# Altium PCB PCB_Rev1.PcbDoc
Units mil, origin at the board's own origin, x right, y up, seen from the top; angles counter-clockwise.
Board outline 835 x 1005 mil, 2 copper layers (Top Layer, Bottom Layer); 29 components, 21 nets, 120 pads, 30 vias.
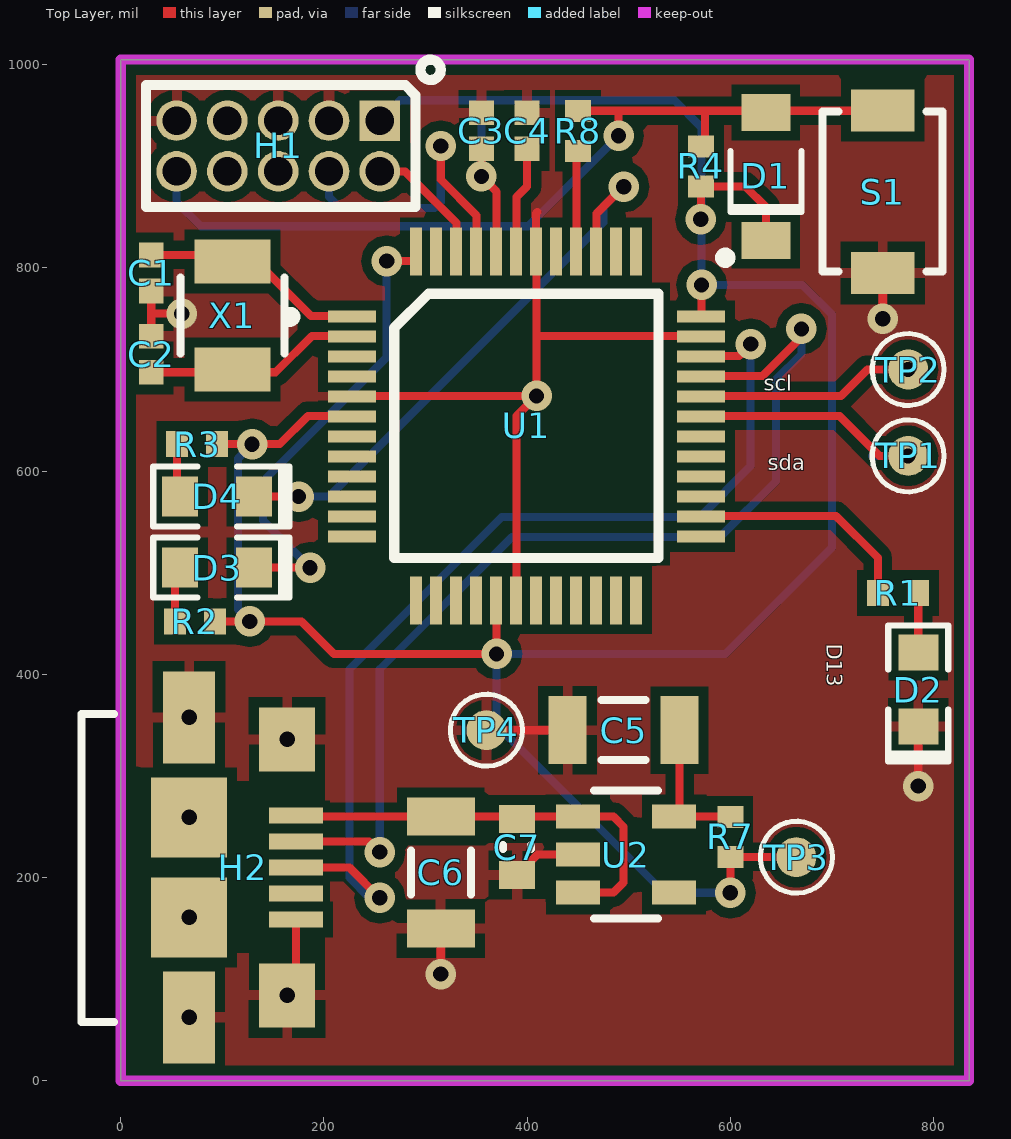
[diagram p0: Top Layer view]
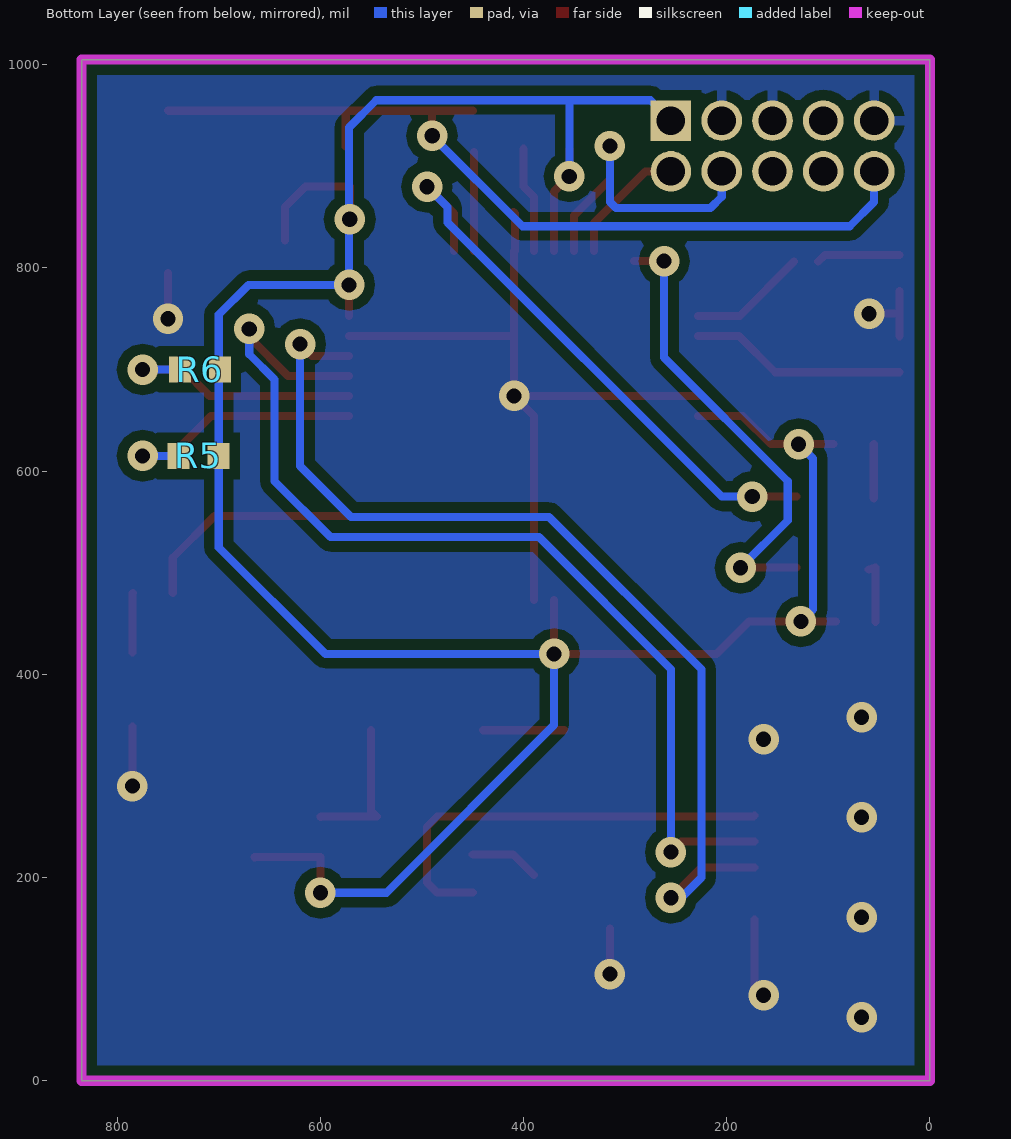
[diagram p1: Bottom Layer view, seen from below]
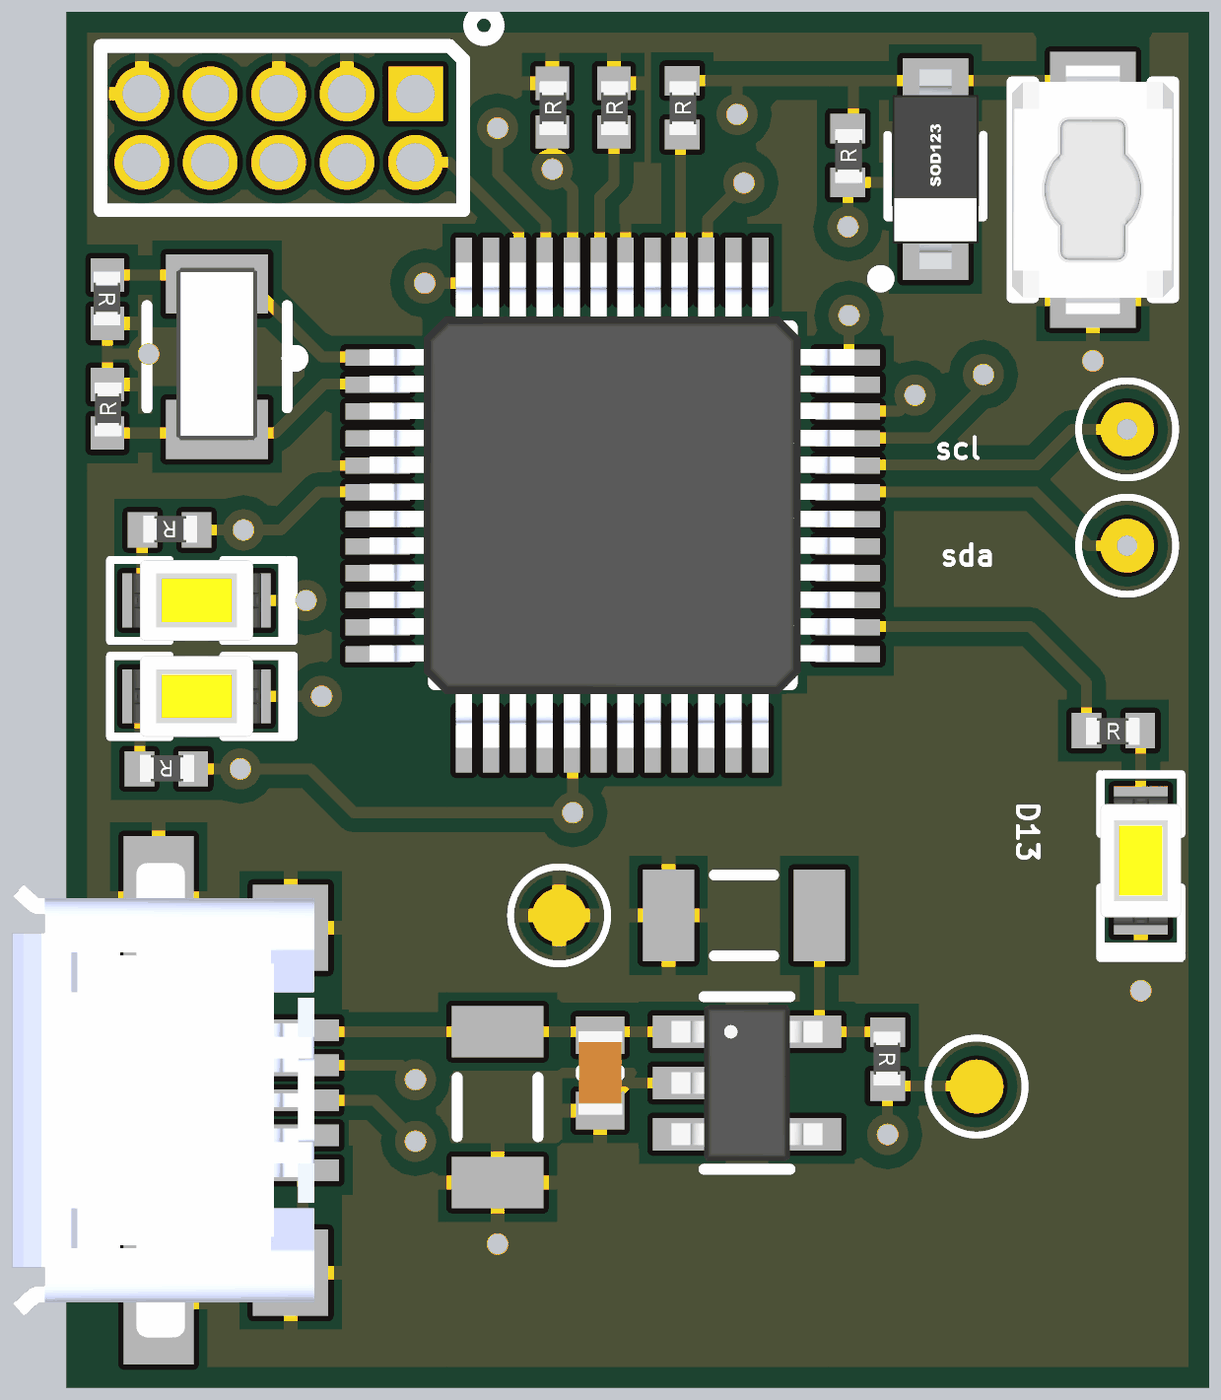
[diagram p2: 3D render of the assembled board from above, using the file's embedded part models]

## Layer stack, top to bottom
Top Solder: solder mask 0.4, Solder Resist, Dk 3.5
Top Layer: signal copper 1.4
Dielectric 1: dielectric 12.6, FR-4, Dk 4.8
Bottom Layer: signal copper 1.4
Bottom Solder: solder mask 0.4, Solder Resist, Dk 3.5

## Board outline
0,0 835,0 835,1005 0,1005

## Design rules (kind name [scope] priority, off if disabled: settings)
Clearance Clearance_U1 [HasFootprint ('LQFP48')] p1: gap=7
Clearance Clearance_USB [HasFootprint ('1981584-1')] p2: gap=7
Clearance [All] p3: gap=10
MinimumSolderMaskSliver [All] p1: minsoldermaskwidth=1
PolygonConnect PolygonConnect_GND [(IsVia) vs InNet('GND')] p1: connectstyle=Direct reliefconductorwidth=10 reliefentries=4 polygonreliefangle="90 Angle" airgapwidth=10
PolygonConnect [All] p2: connectstyle=Relief reliefconductorwidth=10 reliefentries=4 polygonreliefangle="90 Angle" airgapwidth=10
RoutingVias [All] p1: holewidth=28 width=50 viastyle="Through Hole" minholewidth=15 minwidth=30 maxholewidth=15 maxwidth=30
SilkToSilkClearance [All] p1: silktosilkclearance=4
SilkToSolderMaskClearance [IsPad] p1: minsilkscreentomaskgap=3 clearancetoexposedcopper=TRUE
SolderMaskExpansion [All] p1: expansion=4
Width [All] p1: maxlimit=10 minlimit=8 preferedwidth=8
27 further rules are at their usual default settings.

## Components (designator, comment, footprint, x,y, rotation, side; value= is the part's Value field where it differs from the comment)
C1 "22pF" CAPC1005X56N 30,795 r270 top
C2 "22pF" CAPC1005X56N 30,715 r90 top
C3 "0.1uF" CAPC1005X56N 355,935 r90 top
C4 "1uF" CAPC1005X56N 400,935 r90 top
C5 "CAP_1206" CAPC3216X160L 495,345 r180 top
C6 "CAP_1206" CAPC3216X160L 315,205 r270 top
C7 "" CAPC1608X09L 390,230 r270 top
D1 "1N4148" SOD123 635,890 r90 top
D2 "LED_0603" LED1608X55N-YELLOW 785,385 r90 top
D3 "LED_0603" LED1608X55N-YELLOW 95,505 r180 top
D4 "LED_0603" LED1608X55N-YELLOW 95,575 r180 top
H1 "ISP" HDR5X2-50MIL 155,920 r180 top
H2 "Micro USB" 1981584-1 120,210 r270 top
R1 "470R" RESC1005X40N 765,480 r0 top
R2 "470R" RESC1005X40N 73,452 r180 top
R3 "470R" RESC1005X40N 75.31,626.54 r180 top
R4 "10K" RESC1005X40N 571,900 r90 top
R5 "10K" RESC1005X40N 720,615 r0 bottom
R6 "10K" RESC1005X40N 718.73,700.23 r0 bottom
R7 "0R" RESC1005X40N 600,240 r270 top
R8 "330R" RESC1005X40N 450,935 r90 top
S1 "PPushButton" TL1015AF160QG 750,875 r90 top
TP1 "Test Point, 1mm Top Layer" TP100TL 775,615 r90 top
TP2 "Test Point, 1mm Top Layer" TP100TL 775,700 r90 top
TP3 "Test Point, 1mm Top Layer" TP100TL 665,220 r90 top
TP4 "Test Point, 1mm Top Layer" TP100TL 360,345 r90 top
U1 "ATSAMD21G18A-MU" LQFP48 399.24,644.6 r0 top
U2 "LP2985-33DBVR" SOT95P280X144-5N 497.24,222.6 r0 top
X1 "ECS-.327-12.5-34B" ECS-.327-12.5-34B 110,755 r270 top

## Footprints (in the part's own frame and the unit in brackets; to place one, negate y for a bottom-side part, rotate by r counter-clockwise, add the part's x,y. Pads: shape width x height; smd on the part's side, far side on the other; paste and mask are expansions set on the pad)
1981584-1 [mm] "CONN RCPT MICRO USB TYPE AB"
  rect 0.4x1.35 smd: 1(-1.3,1.338) 2(-0.65,1.338) 3(0,1.338) 4(0.65,1.338) 5(1.3,1.338)
  rect 2.3x1.3 smd: ""(-3.75,-1.337) ""(3.75,-1.337)
  rect 1.6x1.4 smd: ""(-3.2,1.113) ""(3.2,1.113)
  rect 2x1.9 smd: ""(-1.25,-1.337) ""(1.25,-1.337)
  silkscreen extent -3.84,-4.02 3.86,-3.21, body extent -4.4,-4.05 4.4,1.55, height 2.75
CAPC1005X56N [mm] "Chip Capacitor, 2-Leads, Body 1.0x0.5mm, IPC Medium Density (0402 ceramic)"
  rect 0.62x0.62 smd: 1(-0.45,0) 2(0.45,0)
  body extent -0.55,-0.3 0.55,0.3, height 0.6
CAPC1608X09L [mm] "Chip Capacitor, 2-Leads, Body 1.6x0.8mm, IPC High Density (0603 dense)"
  rect 0.7x0.9 smd: 1(-0.7,0) 2(0.7,0)
  silkscreen extent -0.05,-0.35 0.05,0.35, body extent -0.89,-0.48 0.88,0.48, height 1.03
CAPC3216X160L [mm] "Chip Capacitor, 2-Leads, Body 3.2x1.6mm, IPC Least Density(C1206)"
  rect 0.95x1.7 smd: 1(-1.4,0) 2(1.4,0)
  silkscreen extent -0.55,-0.75 0.55,0.75, body extent -1.7,-0.9 1.7,0.9, height 1.9
ECS-.327-12.5-34B [mm] "SMT Crystal, 2-Leads, Body 3.2x1.5mm, IPC Medium Density"
  rect 1.1x1.9 smd: 1(-1.3,0) 2(1.4,0)
  silkscreen extent -0.9,-1.3 1,1.3, body extent -1.6,-0.75 1.6,0.75, height 0.91
HDR5X2-50MIL [mil]
  rect 40x40 hole 28: 1(-100,-25)
  round 40 hole 28: 2(-100,25) 3(-50,-25) 4(-50,25) 5(0,-25) 6(0,25) 7(50,-25) 8(50,25) 9(100,-25) 10(100,25)
  silkscreen extent -160,-85 130,60
LED1608X55N-YELLOW [mm] "Chip LED YELLOW, 2-Leads, Body 1.6x0.8mm, IPC Medium Density (0603 med)"
  rect 0.9x1 smd: 1(-0.925,0) 2(0.925,0)
  silkscreen extent -1.8,-0.75 1.6,0.75, body extent -1.2,-0.75 1.2,0.75, height 1.4
LQFP48 [mm] "48-TQFP (7x7) Wire Leads, LQFP48"
  rect 1.2x0.3 smd: 1(-4.362,2.738) 2(-4.362,2.238) 3(-4.362,1.738) 4(-4.362,1.238) 5(-4.362,0.738) 6(-4.362,0.238) 7(-4.362,-0.262) 8(-4.362,-0.762) 9(-4.362,-1.262) 10(-4.362,-1.762) 11(-4.362,-2.262) 12(-4.362,-2.762) 25(4.363,-2.762) 26(4.363,-2.262) 27(4.363,-1.762) 28(4.363,-1.262) 29(4.363,-0.762) 30(4.363,-0.262) 31(4.363,0.238) 32(4.363,0.738) 33(4.363,1.238) 34(4.363,1.738) 35(4.363,2.238) 36(4.363,2.738)
  rect 0.3x1.2 smd: 13(-2.762,-4.362) 14(-2.262,-4.362) 15(-1.762,-4.362) 16(-1.262,-4.362) 17(-0.763,-4.362) 18(-0.262,-4.362) 19(0.238,-4.362) 20(0.737,-4.362) 21(1.237,-4.362) 22(1.737,-4.362) 23(2.237,-4.362) 24(2.737,-4.362) 37(2.738,4.363) 38(2.238,4.363) 39(1.737,4.363) 40(1.238,4.363) 41(0.738,4.363) 42(0.238,4.363) 43(-0.262,4.363) 44(-0.762,4.363) 45(-1.262,4.363) 46(-1.762,4.363) 47(-2.262,4.363) 48(-2.762,4.363)
  silkscreen extent -6.02,-3.3 3.3,3.3, body extent -4.51,-4.5 4.49,4.5, height 1.5
RESC1005X40N [mm] "Chip Resistor, 2-Leads, Body 1.0x0.5mm, IPC Medium Density (0402)"
  rect 0.55x0.65 smd: 1(-0.5,0) 2(0.5,0)
  body extent -0.52,-0.27 0.53,0.28, height 0.4
SOD123 [mil] "Molded Diode, 2-Leads, Body 2.85x1.8mm, IPC Medium Density (SOD123)"
  rect 36x48 smd: 1(-63,0) 2(63,0)
  silkscreen extent -85,-35 25,45, body extent -73,-31 73,31, height 50
SOT95P280X144-5N [mm] "SOT23, 5-Leads, Body 3.1x3.0mm (max), Pitch 0.95mm, IPC Medium Density (RFMD SOT23-5)"
  rect 1.1x0.6 smd: 1(-1.2,0.95) 2(-1.2,0) 3(-1.2,-0.95) 4(1.2,-0.95) 5(1.2,0.95)
  silkscreen extent -0.8,-1.6 0.8,1.6, body extent -1.4,-1.45 1.4,1.45, height 1.45
TL1015AF160QG [mm] "SWITCH TACTILE SPST-NO 0.05A 12V"
  rect 1.05x1.59 smd: 1(-2.032,0) 2(2.032,0)
  silkscreen extent -2,-1.5 2,1.5, body extent -2.3,-1.5 2.3,1.5, height 2
TP100TL [mm] "Test Point"
  round 1 smd paste-0.5 mask+0.076: 1(0,0)
  silkscreen extent -0.9,-0.9 0.9,0.9

## Part data
C1 C2 C3 C4: library part CAP_0402, "CAP 0402"
C5 C6: "CAP CER 4.7uF, 1206"
C7: library part CAP_0603, "CAP CER 0.1uF, 0603"
D1: library part 1N4148W-TP, "DIODE SWITCH 100V 0.15A SOD123"
H1: library part CON5X2, "JTAG CONN HEADER 5X2POS 50mil\" PADS"
H2: library part 1981584-1, "CONN RCPT MICRO USB TYPE AB"
R1 R2 R3 R4 R5 R6 R7 R8: library part RES_0402, "RES 0402"
S1: library part DX_MINI_TACT_SWITCH, "DX_SWITCH TACTILE"
U1: "IC MCU 32BIT 256KB FLASH 48QFN"
U2: "IC REG LDO 3.3V .15A SOT23-5"
X1: "CRYSTAL 32.768 KHZ 12.5PF SMD"

## Via types
v1: diameter 30, hole 15, Top Layer to Bottom Layer, tented both sides, 30 vias

## Nets (pads, with @x,y where several pads share a name; then routed paths per layer and width w, separated by ;. In a path a pad name is that pad's centre, name@x,y a point inside that pad or via, vN(x,y) a via of type N, cw(c..) or ccw(c..) an arc to the next point about the centre after c; other vN are vias at no path point)
+3.3V: C3.1 D1.1 H1.1 R2.1 R3.1 R4.1 R5.1 R6.1 R7.2 TP3.1 U1.6 U1.17 U1.36 U1.44 | length 2722.5
  Top Layer w8: R2.1 v1(127,452) 178,452 209.98,420.02 v1(369.98,420.02) U1.17@369.98,473.25 ; R3.1 v1(129.31,626.54) 156.54,626.54 184.35,654.35 U1.6@228.25,654.35 ; C3.1 v1(355,890) 369.98,875.02 U1.44@369.98,816.75 ; v1(571,848) R4.1 ; U1.36@571.75,752.78 v1(571.75,783.25) ; R4.1@575,880.32 614.68,880.32 635,860 D1.1 ; v1(600,185) R7.2 664.69,220.31 TP3.1
  Bottom Layer w8: v1(127,452) 115.29,463.71 115.29,612.51 v1(129.31,626.54) ; H1.1 275,965 355,965 ; v1(355,890) 355,965 ; v1(600,185) 535,185 369.98,350.02 v1(369.98,420.02) 595.02,420.02 700,525 700,754 670.75,783.25 v1(571.75,783.25) 571.75,938.25 545,965 355,965
D13: R1.1 U1.26 | length 225.3
  Top Layer w8: U1.26@571.75,555.93 704.07,555.93 745.31,514.69 R1.1
D+: H2.3 U1.34 | length 988.9
  Top Layer w8: H2.3 225,210 v1(255,180) ; U1.34@571.75,713.41 608.41,713.41 v1(620,725)
  Bottom Layer w8: v1(255,180) 245,180 225,200 225,405 375,555 570,555 620,605 v1(620,725)
D-: H2.2 U1.33 | length 1015.8
  Top Layer w8: H2.2 244.41,235.59 v1(255,225) ; U1.33@571.75,693.72 631.72,693.72 670,732 v1(670,740)
  Bottom Layer w8: v1(255,225) 255,405 385,535 590,535 645,590 645,690 670,715 v1(670,740)
GND: C1.2 C2.2 C3.2 C4.2 C5.2 C6.2 C7.2 D2.1 H1.3 H1.5 H1.9 H2. H2.5 S1.1 TP4.1 U1.5 U1.18 U1.35 U1.42 U2.2 | length 1184.1
  Top Layer w8: C2.2 30,755 ; C1.2 30,755 ; v1(60,755) 30,755 ; v1(163.8,84.02) 172.66,92.87 H2.5 ; U1.5@228.25,674.04 v1(409.35,674.04) ; v1(315,105) C6.2 ; TP4.1 C5.2 ; U1.18@389.67,473.25 389.67,654.35 v1(409.35,674.04) ; C7.2 410.16,222.6 U2.2 ; U1.42 408.59,853.59 410,855 ; U1.42@409.35,816.75 409.35,733.09 ; U1.35@571.75,733.09 409.35,733.09 ; v1(750,750) S1.1 ; v1(785,290) D2.1 ; v1(409.35,674.04) 409.35,733.09
  other v1: 67.34,62.36 67.34,160.79 67.34,259.21 163.8,335.98 67.34,357.64
NetC1_1: C1.1 U1.1 X1.1 | length 199.3
  Top Layer w8: C1.1 103.46,812.72 X1.1 ; X1.1@133.82,806.18 187.22,752.78 U1.1@228.25,752.78
NetC2_1: C2.1 U1.2 X1.2 | length 213.1
  Top Layer w8: C2.1 152.28,697.28 188.09,733.09 U1.2@228.25,733.09
NetC4_1: C4.1 U1.43 | length 104.8
  Top Layer w8: U1.43@389.67,816.75 389.67,869.67 400,880 C4.1
NetC5_1: C5.1 R7.1 U2.5 | length 143
  Top Layer w8: C5.1 550.12,265.63 U2.5 599.69,260 R7.1
NetD2_2: D2.2 R1.2 | length 58.7
  Top Layer w8: R1.2 785,479.69 D2.2
NetD3_2: D3.2 R2.2 | length 60.2
  Top Layer w8: R2.2@53.58,451.73 53.58,505 58.27,503.79 D3.2@60.31,503.27
NetD4_2: D4.2 R3.2 | length 53.3
  Top Layer w8: D4.2@55.31,573.27 R3.2@55.31,626.54
NetH1_2: H1.2 U1.46 | length 124.2
  Top Layer w8: H1.2 280,895 330.61,844.39 U1.46@330.61,816.75
NetH1_4: H1.4 U1.45 | length 314.9
  Top Layer w8: v1(315,920) 315,887 350.3,851.7 U1.45@350.3,816.75
  Bottom Layer w8: H1.4 205,870 216,859 309,859 315,865 v1(315,920)
PA27_TX_LED: D4.1 U1.39 | length 573
  Top Layer w8: D4.1 v1(175,575) ; U1.39@468.41,816.75 468.41,853.41 v1(495,880)
  Bottom Layer w8: v1(175,575) 205,575 474.87,844.87 474.87,859.87 v1(495,880)
PB03_RX_LED: D3.1 U1.48 | length 464.5
  Top Layer w8: D3.1 v1(186.42,505) v1@195,505 ; v1(261.75,806.75) U1.48@291.24,806.75
  Bottom Layer w8: v1(186.42,505) 140,551.42 140,590 261.75,711.75 v1(261.75,806.75)
RESET: D1.2 H1.10 R4.2 R8.2 S1.2 | length 871.6
  Top Layer w8: R8.2 490,954.69 ; v1(490,930) 490,954.69 ; R4.2@575,919.69 575,954.69 ; S1.2 749.69,954.69 490,954.69
  Bottom Layer w8: H1.10 55,865 79,841 401,841 v1(490,930)
SCL: R6.2 TP2.1 U1.32 | length 250.7
  Top Layer w8: U1.32@571.75,674.04 709.04,674.04 735,700 v1(775,700)
  Bottom Layer w8: R6.2 738.64,700 v1(775,700)
SDA: R5.2 TP1.1 U1.31 | length 254.9
  Top Layer w8: U1.31@571.75,654.35 707.65,654.35 747,615 v1(775,615)
  Bottom Layer w8: R5.2 v1(775,615)
TARGET_RESET: R8.1 U1.40 | length 97.3
  Top Layer w8: U1.40@448.72,816.75 R8.1@448.72,914.04
VUSB: C6.1 C7.1 H2.1 U2.1 U2.3 | length 431
  Top Layer w8: H2.1 173.84,260 U2.1 485,260 495,250 495,195 485.2,185.2 U2.3
pads on no net: H1.6 H1.7 H1.8 H2.4 U1.3 U1.4 U1.7 U1.8 U1.9 U1.10 U1.11 U1.12 U1.13 U1.14 U1.15 U1.16 U1.19 U1.20 U1.21 U1.22 U1.23 U1.24 U1.25 U1.27 U1.28 U1.29 U1.30 U1.37 U1.38 U1.41 U1.47 U2.4

## Polygon pours and split planes (outlines as drawn)
GND on Bottom Layer "Bottom Layer-No Net" (solid, pour order 4): 0,1005 835,1005 835,0 0,0 0,1005
GND on Top Layer "Top Layer-No Net" (solid, remove dead copper, pour order 6): 0,1005 835,1005 835,0 -5,0 0,5 0,1005

## Keep-outs
Keep-Out Layer:
  the board outline again, w10

## Other copper
Top Layer:
  pour cut-out: 95,295 200.85,295 201.36,294.49 201.36,125.51 95.51,125.51 95,125
  pour cut-out: 260,507 541,507 541,786 266.49,786 260,779.51

## Silkscreen, mask and mechanical layers (free items; w line width, h text height)
Top Overlay:
  text "scl" at 633,679 h15
  text "sda" at 637,601 h15
  text "D13" at 695,430 h15 r270
Mechanical 1:
  the board outline again, w10